# Altium PCB BEE-DAL_EXP.PcbDoc (part 2 of 5)
Units mm, origin at the board's own origin, x right, y up, seen from the top; angles counter-clockwise.
Board outline 93 x 90 mm, 6 copper layers (L1 TOP, L2 GND, L3 SIGNAL, L4 PWR, L5 GND, L6 BOT), stack 1.516 mm thick; 548 components, 447 nets, 1827 pads, 1142 vias.
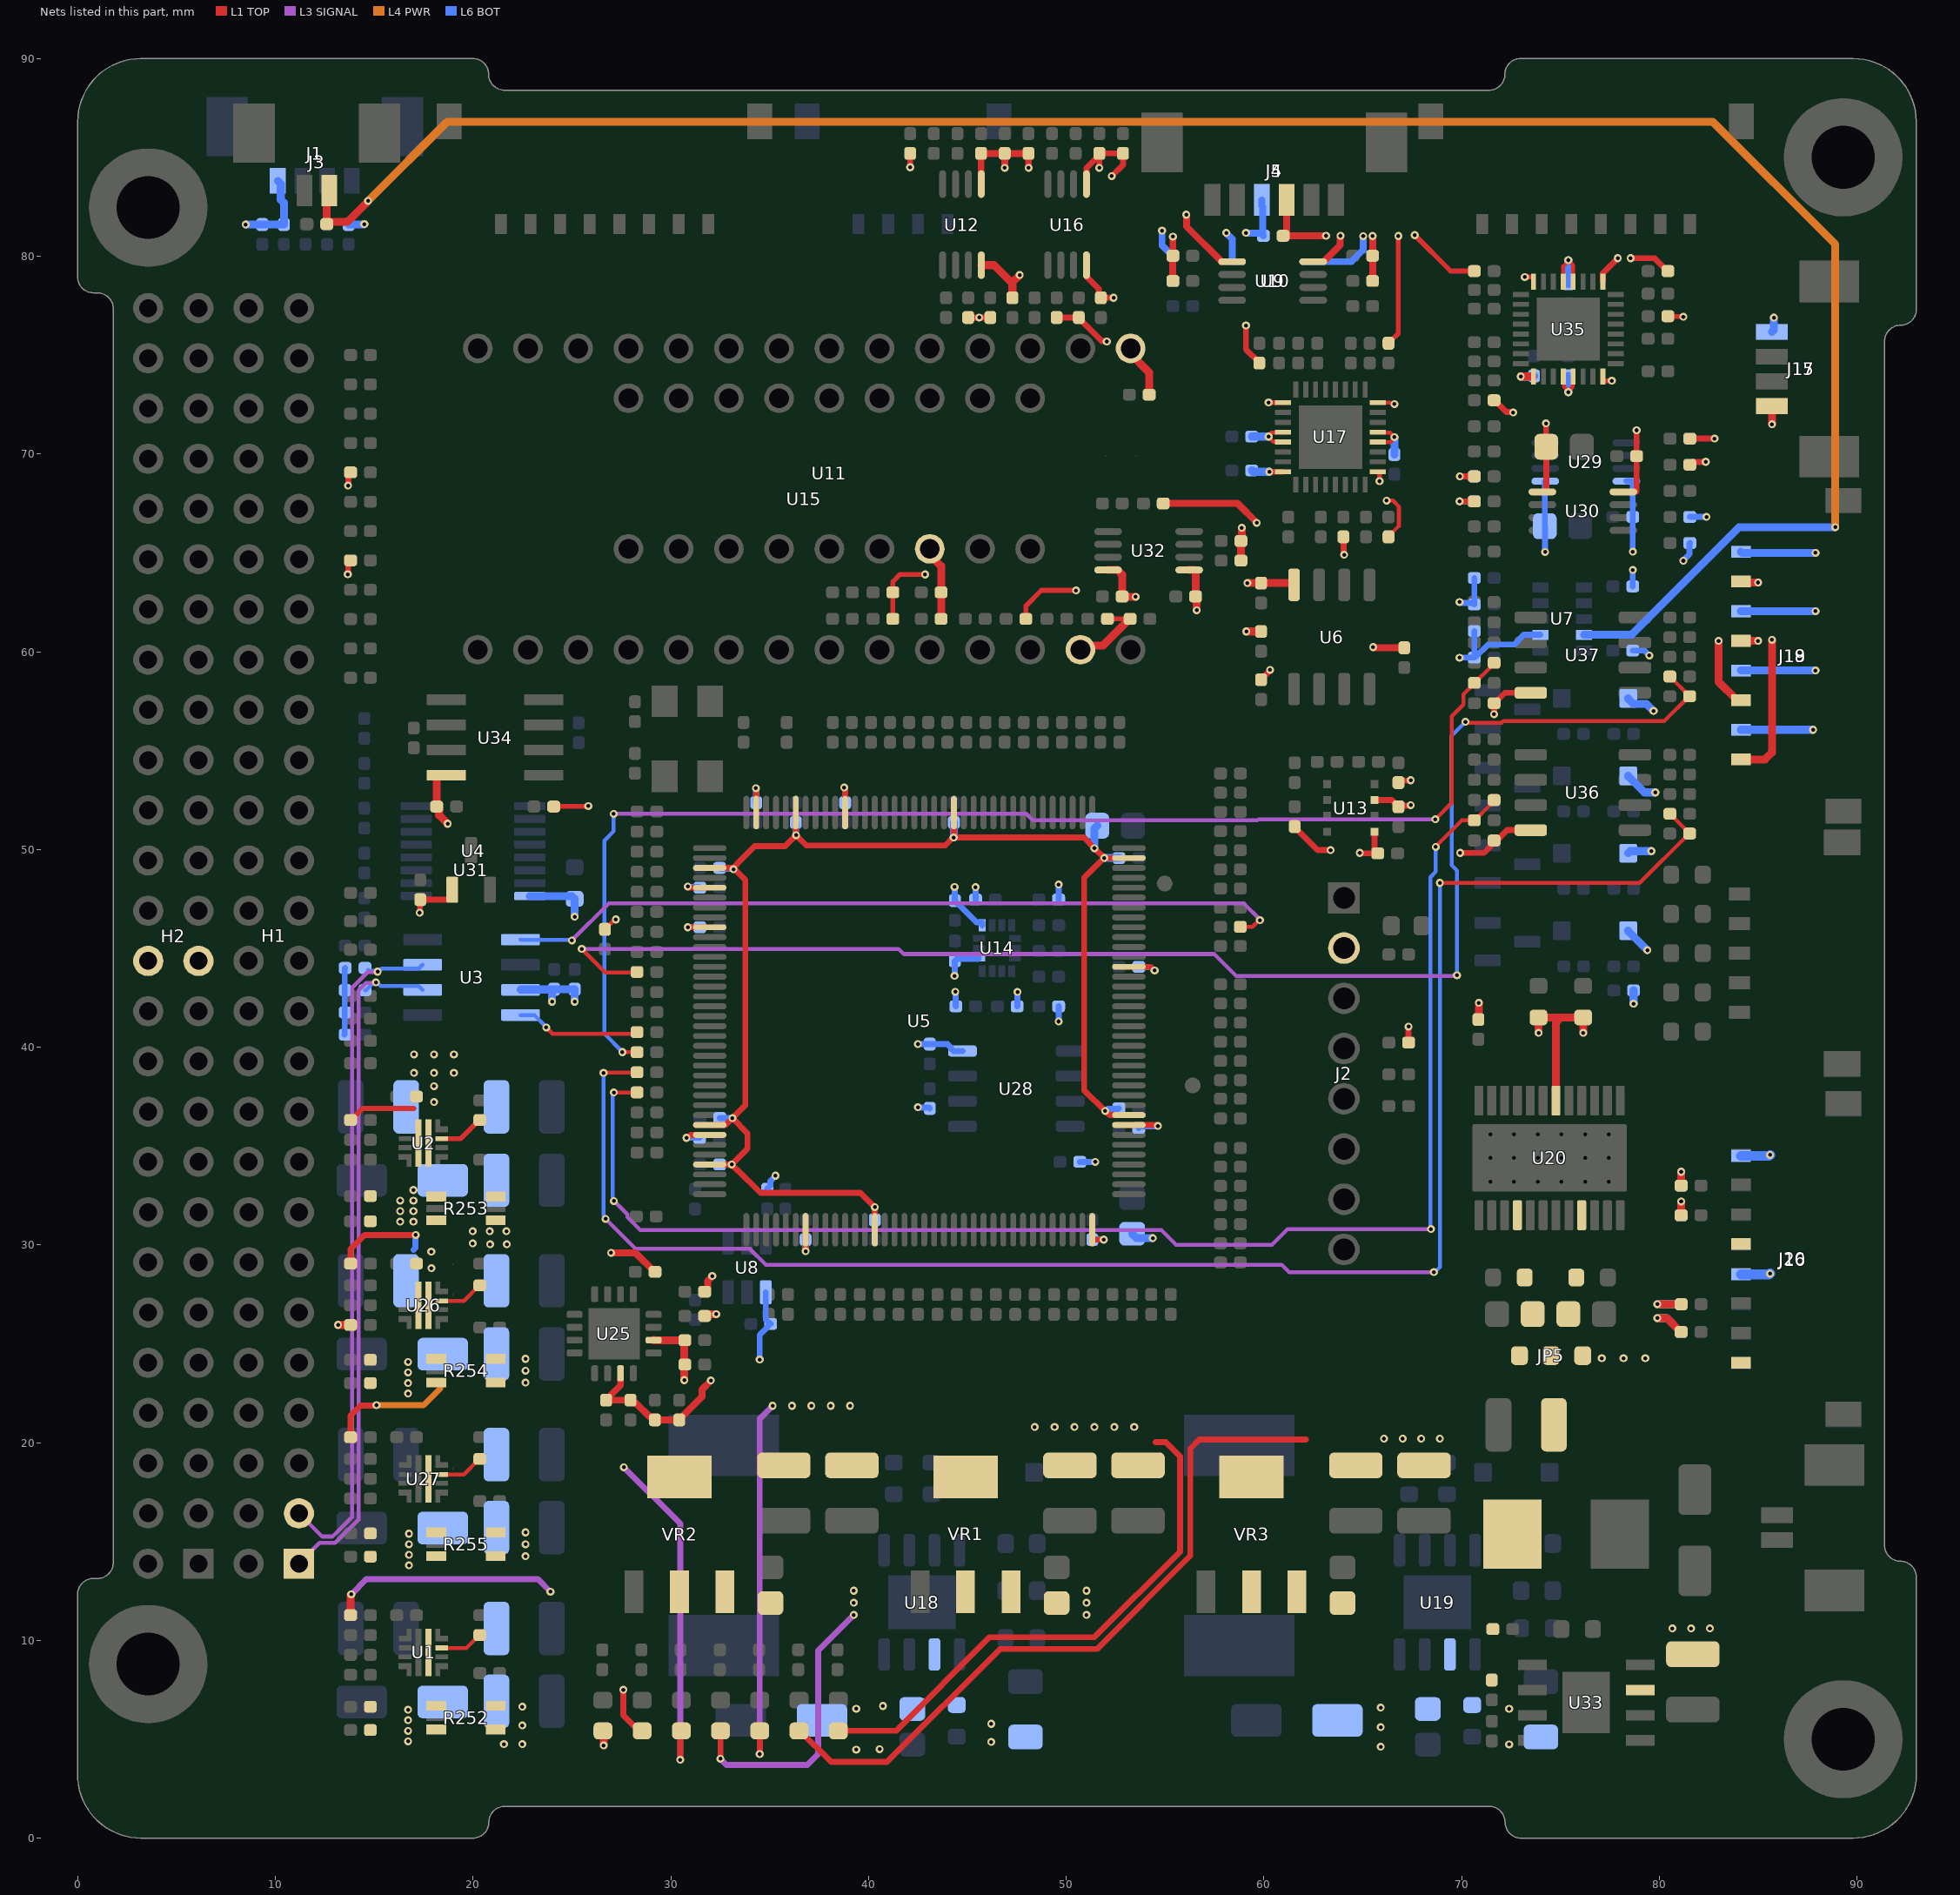
[diagram p6: the nets of this part, all layers, seen from the top]

## Footprints (in the part's own frame and the unit in brackets; to place one, negate y for a bottom-side part, rotate by r counter-clockwise, add the part's x,y. Pads: shape width x height; smd on the part's side, far side on the other; paste and mask are expansions set on the pad) (continued)
Header_254P_8x1 [mm]
  rect 1.6x1.6 hole 1.1: 1(-8.89,0)
  round 1.6 hole 1.1: 2(-6.35,0) 3(-3.81,0) 4(-1.27,0) 5(1.27,0) 6(3.81,0) 7(6.35,0) 8(8.89,0)
  silkscreen extent -10.16,-1.27 10.16,1.27
HEX-M3_NoVia [mm]
  round 6 / inner round 4.4 / far side round 6 hole 3.18: 1(0,0)
IC_BME688 [mm]
  rect 0.4x0.4 smd: 1(1.2,1.2) 2(1.2,0.4) 3(1.2,-0.4) 4(1.2,-1.2) 5(-1.2,-1.2) 6(-1.2,-0.4) 7(-1.2,0.4) 8(-1.2,1.2)
  silkscreen extent -1.5,-1.72 2.14,1.72, body extent -1.5,-1.5 1.5,1.5, height 1
IC_DRV8910QPWPRQ1 [mm]
  rrect25% 1.5x0.45 smd mask+0: 1(-2.9,3.575) 2(-2.9,2.925) 3(-2.9,2.275) 4(-2.9,1.625) 5(-2.9,0.975) 6(-2.9,0.325) 7(-2.9,-0.325) 8(-2.9,-0.975) 9(-2.9,-1.625) 10(-2.9,-2.275) 11(-2.9,-2.925) 12(-2.9,-3.575) 13(2.9,-3.575) 14(2.9,-2.925) 15(2.9,-2.275) 16(2.9,-1.625) 17(2.9,-0.975) 18(2.9,-0.325) 19(2.9,0.325) 20(2.9,0.975) 21(2.9,1.625) 22(2.9,2.275) 23(2.9,2.925) 24(2.9,3.575)
  round 0.3 hole 0.2 mask+0: 25(-1.2,3) 25(-1.2,1.8) 25(-1.2,0.6) 25(-1.2,-0.6) 25(-1.2,-1.8) 25(-1.2,-3) 25(0,3) 25(0,1.8) 25(0,0.6) 25(0,-0.6) 25(0,-1.8) 25(0,-3) 25(1.2,3) 25(1.2,1.8) 25(1.2,0.6) 25(1.2,-0.6) 25(1.2,-1.8) 25(1.2,-3)
  rrect4% 3.4x7.8 smd paste-5 mask+0: 25(0,0)
  L1 TOP region: -1.7,3.9 -1.7,-3.9 1.7,-3.9 1.7,3.9
  silkscreen extent -3.56,-4.06 2.29,4.19, body extent -3.2,-3.9 3.2,3.9, height 1.2
IC_RV-3129-C3_32.768KHZ_OPTION_A_TB_QA [mm]
  rect 0.8x0.5 smd mask+0.05: 1(-1.1,1.6) 2(-1.1,0.8) 3(-1.1,0) 4(-1.1,-0.8) 5(-1.1,-1.6) 6(1.1,-1.6) 7(1.1,-0.8) 8(1.1,0) 9(1.1,0.8) 10(1.1,1.6)
  silkscreen extent -1.85,-1.85 0.38,2.2, body extent -1.25,-1.85 1.25,1.85, height 0.9
IND_MP_1250x1250x850 [mil]
  rect 122x220 smd paste+0 mask+0: 1(-199,0) 2(199,0)
  L1 TOP keep-out region: -136,-244 -136,244 136,244 136,-244
  silkscreen extent -251,-251 251,251, body extent -236,-236 236,236, height 305
JUMPER_1-2_1608X60 [mm] "Chip Resistor, 2-Leads, Body 1.63x0.83mm, IPC High Density"
  rrect50% 0.85x0.95 smd: 1(0,0) 2(-1.6,0) 3(1.6,0)
  silkscreen extent -1.7,-0.7 1.8,0.7, body extent -1.67,-0.48 0.08,0.48, height 0.6
JUMPER_1608 [mil]
  round 1 smd paste-99999: 1(30.51,0) 2(-30,0)
  L1 TOP region: -14.86,-0.09 3.75,-18.7 -38.37,-18.7 -41.57,-18.06 -44.28,-16.25 -46.1,-13.54 -46.73,-10.33 -46.73,-10.33 -46.73,10.33 -46.1,13.54 -44.28,16.25 -41.57,18.06 -38.37,18.7 -38.37,18.7 3.93,18.7
  L1 TOP region: 38.88,-18.7 13.56,-18.7 -5,0 13.56,18.7 38.88,18.7 42.08,18.06 44.79,16.25 46.61,13.54 47.24,10.33 47.24,10.33 47.24,-10.33 46.61,-13.54 44.79,-16.25 42.08,-18.06 38.88,-18.7
  silkscreen extent -40,-27 41,27
LED_0603 [mm]
  rrect50% 0.85x0.95 smd: 1(-0.775,0) 2(0.775,0)
  silkscreen extent -1.4,-0.7 0.9,0.7, body extent -0.8,-0.4 0.8,0.4, height 0.7
molex_0532610271 [mm]
  rect 0.8x1.6 smd mask+0.076: 1(-0.625,2.4) 2(0.625,2.4)
  rect 2.1x3 smd mask+0.076: M1(-3.175,-0.5) M2(3.175,-0.5)
  silkscreen extent -3.83,-2.6 3.83,3.6, body extent -3.83,-2.6 3.83,2.6, height 3.4
MOLEX_0532610271 [mm]
  rect 0.8x1.6 smd mask+0.076: 1(-0.625,2.4) 2(0.625,2.4)
  rect 2.1x3 smd mask+0.076: M1(-3.175,-0.5) M2(3.175,-0.5)
  silkscreen extent -3.83,-2.6 3.83,3.6, body extent -3.83,-2.6 3.83,2.6, height 3.4
MOLEX_0532610471 [mm]
  rect 0.8x1.6 smd mask+0.076: 1(-1.875,2.4) 2(-0.625,2.4) 3(0.625,2.4) 4(1.875,2.4)
  rect 2.1x3 smd mask+0.076: M1(-4.425,-0.5) M2(4.425,-0.5)
  silkscreen extent -5.07,-2.6 5.07,3.4, body extent -5.07,-2.6 5.07,2.6, height 3.4
MOLEX_0532610671 [mm]
  rect 0.8x1.6 smd: 1(-3.125,1.45) 2(-1.875,1.45) 3(-0.625,1.45) 4(0.625,1.45) 5(1.875,1.45) 6(3.125,1.45)
  rect 2.1x3 smd: M1(-5.675,-1.45) M2(5.675,-1.45)
  silkscreen extent -6.12,-3.55 6.12,2, body extent -6.32,-3.43 6.32,1.77, height 3.4
MOLEX_0533980471 [mm]
  rect 0.8x1.3 smd mask+0.076: 1(1.875,-1.75) 2(0.625,-1.75) 3(-0.625,-1.75) 4(-1.875,-1.75)
  rect 2.1x3 smd mask+0.076: M1(4.425,1) M2(-4.425,1)
  silkscreen extent -5.07,-2.6 5.07,2.1, body extent -5.07,-2.15 5.07,2.05, height 4.7
MOLEX_5040500491 [mm]
  rect 0.6x1 smd mask+0.076: 1(2.25,-2.87) 2(0.75,-2.87) 3(-0.75,-2.87) 4(-2.25,-2.87)
  rect 1.25x1.8 smd mask+0.076: M1(4.855,2.32) M2(-4.855,2.32)
  silkscreen extent -5.28,-3.7 5.28,3.22, body extent -5.27,-3.2 5.28,3.24, height 2
MOLEX_5040500591 [mil]
  rect 26x41 smd paste+0 mask+4.02: 1(118.11,-119.76) 2(59.06,-119.76) 3(0,-119.76) 4(-59.06,-119.76) 5(-118.11,-119.76)
  rect 51x73 smd paste+0 mask+4.02: M1(220.67,84.57) M2(-220.67,84.57)
  silkscreen extent -226,-155 226,125, body extent -237,-128 237,126, height 78
MOLEX_5040500891 [mm]
  rect 0.6x1 smd mask+0.076: 1(5.25,-2.87) 2(3.75,-2.87) 3(2.25,-2.87) 4(0.75,-2.87) 5(-0.75,-2.87) 6(-2.25,-2.87) 7(-3.75,-2.87) 8(-5.25,-2.87)
  rect 1.25x1.8 smd mask+0.076: M1(7.855,2.32) M2(-7.855,2.32)
  silkscreen extent -8.27,-3.7 8.27,3.22, body extent -8.27,-3.2 8.27,3.24, height 2
MP_HIGHDRIVER [mm]
  round 1.5 hole 1 paste-2539.97 mask+0: 1(-10.16,-3.81) 2(-7.62,-3.81) 3(-5.08,-3.81) 4(-2.54,-3.81) 5(0,-3.81) 6(2.54,-3.81) 7(5.08,-3.81) 8(7.62,-3.81) 9(10.16,-3.81) 10(10.16,3.81) 11(7.62,3.81) 12(5.08,3.81) 13(2.54,3.81) 14(0,3.81) 15(-2.54,3.81) 16(-5.08,3.81) 17(-7.62,3.81) 18(-10.16,3.81)
  silkscreen extent -12.7,-5.38 12.7,5.08, body extent -12.88,-5.15 12.88,5.2, height 7.25
MP_HIGHDRIVER4 [mm]
  round 1.5 hole 1 paste-2539.97 mask+0: 1(-16.51,-7.62) 2(-13.97,-7.62) 3(-11.43,-7.62) 4(-8.89,-7.62) 5(-6.35,-7.62) 6(-3.81,-7.62) 7(-1.27,-7.62) 8(1.27,-7.62) 9(3.81,-7.62) 10(6.35,-7.62) 11(8.89,-7.62) 12(11.43,-7.62) 13(13.97,-7.62) 14(16.51,-7.62) 15(16.51,7.62) 16(13.97,7.62) 17(11.43,7.62) 18(8.89,7.62) 19(6.35,7.62) 20(3.81,7.62) 21(1.27,7.62) 22(-1.27,7.62) 23(-3.81,7.62) 24(-6.35,7.62) 25(-8.89,7.62) 26(-11.43,7.62) 27(-13.97,7.62) 28(-16.51,7.62)
  silkscreen extent -19.05,-9.19 19.05,8.89, body extent -19.1,-8.93 19.1,8.93, height 6.04
PQFN50P250X300X86-14N [mm]
  rect 0.61x0.35 smd mask+0: 1(-1.16,0.75) 2(-1.16,0.25) 3(-1.16,-0.25) 4(-1.16,-0.75) 8(1.16,-0.75) 9(1.16,-0.25) 10(1.16,0.25) 11(1.16,0.75)
  rect 0.35x0.61 smd mask+0: 5(-0.5,-0.91) 6(0,-0.91) 7(0.5,-0.91) 12(0.5,0.91) 13(0,0.91) 14(-0.5,0.91)
  silkscreen extent -2.19,-1.3 1.55,1.3, body extent -1.5,-1.25 1.5,1.25, height 0.86
PSM6050 [mm]
  rect 3.5x2.95 smd: 1(0,-2.725) 2(0,2.725)
  silkscreen extent -3.58,-3.9 3.6,3.96, body extent -3.3,-3.65 3.3,3.65
RES_C_1005X40 [mm]
  rrect50% 0.65x0.6 smd mask+0.05: 1(-0.5,0) 2(0.5,0)
  silkscreen extent -0.04,-0.3 0.04,0.3, body extent -0.5,-0.3 0.5,0.3, height 0.2
RES_C_1206_SHUNT [mm] "Chip Resistor, 2-Leads, Body 3.2x1.6mm, IPC Medium Density"
  rect 1x0.5 smd mask+0.1: 1(-1.5,-0.6) 1(-1.5,0.6) 2(1.5,-0.6) 2(1.5,0.6)
  rect 1x0.35 smd mask+0.1: 3(-1.5,0) 4(1.5,0)
  silkscreen extent -0.6,-0.77 0.6,0.78, body extent -1.6,-0.8 1.6,0.8, height 1
RES_C_1608X60 [mm] "Chip Resistor, 2-Leads, Body 1.63x0.83mm, IPC High Density"
  rrect50% 0.85x0.95 smd: 1(-0.8,0) 2(0.8,0)
  silkscreen extent -0.9,-0.7 0.9,0.7, body extent -0.87,-0.48 0.87,0.48, height 0.6
RES_C_3216X70 [mm] "Chip Resistor, 2-Leads, Body 3.20x1.60mm, IPC Medium Density"
  rrect39% 1.25x1.75 smd: 1(-1.4,0) 2(1.4,0)
  silkscreen extent -0.6,-0.9 0.6,0.9, body extent -1.68,-0.87 1.68,0.87, height 0.71
SAMTEC_ESQ-126-14-G-D [mm]
  rect 1.53x1.53 hole 0.9: 01(0,0)
  round 1.53 hole 0.9: 02(0,2.54) 03(2.54,0) 04(2.54,2.54) 05(5.08,0) 06(5.08,2.54) 07(7.62,0) 08(7.62,2.54) 09(10.16,0) 10(10.16,2.54) 11(12.7,0) 12(12.7,2.54) 13(15.24,0) 14(15.24,2.54) 15(17.78,0) 16(17.78,2.54) 17(20.32,0) 18(20.32,2.54) 19(22.86,0) 20(22.86,2.54) 21(25.4,0) 22(25.4,2.54) 23(27.94,0) 24(27.94,2.54) 25(30.48,0) 26(30.48,2.54) 27(33.02,0) 28(33.02,2.54) 29(35.56,0) 30(35.56,2.54) 31(38.1,0) 32(38.1,2.54) 33(40.64,0) 34(40.64,2.54) 35(43.18,0) 36(43.18,2.54) 37(45.72,0) 38(45.72,2.54) 39(48.26,0) 40(48.26,2.54) 41(50.8,0) 42(50.8,2.54) 43(53.34,0) 44(53.34,2.54) 45(55.88,0) 46(55.88,2.54) 47(58.42,0) 48(58.42,2.54) 49(60.96,0) 50(60.96,2.54) 51(63.5,0) 52(63.5,2.54)
  silkscreen extent -2.27,-1.2 65.03,3.74, body extent -1.52,-1.27 65.02,3.81, height 11.1
SOD3717X145N [mm]
  rrect22% 0.9x0.95 smd: 1(-1.68,0) 2(1.681,-0.003)
  silkscreen extent -2.4,-1.1 1.5,1.1, body extent -1.83,-0.77 1.83,0.77, height 1.5
SOIC8_150MIL_N_ISI [mil]
  rrect50% 57.5x22 smd paste+0: 1(-107.25,75) 2(-107.25,25) 3(-107.25,-25) 4(-107.25,-75) 5(107.25,-75) 6(107.25,-25) 7(107.25,25) 8(107.25,75)
  silkscreen extent -138,-99 78,98, body extent -122,-99 122,99, height 69
SOIC127P600X175-8N [mm]
  rrect25% 1.97x0.59 smd paste+0 mask+0.102: 1(-2.475,1.905) 2(-2.475,0.635) 3(-2.475,-0.635) 4(-2.475,-1.905) 5(2.475,-1.905) 6(2.475,-0.635) 7(2.475,0.635) 8(2.475,1.905)
  silkscreen extent -4.01,-2.52 1.95,2.52, body extent -3.01,-2.45 3.01,2.45, height 1.63
SOIC127P602X173-8N [mm]
  rrect50% 1.64x0.59 smd: 1(-2.635,1.905) 2(-2.635,0.635) 3(-2.635,-0.635) 4(-2.635,-1.905) 5(2.635,-1.905) 6(2.635,-0.635) 7(2.635,0.635) 8(2.635,1.905)
  silkscreen extent -4.1,-2.5 2,2.8, body extent -3.01,-2.57 3.01,2.57, height 1.73
SOIC127P602X173-8N_EPAD [mm]
  rrect50% 1.64x0.59 smd: 1(-2.635,1.905) 2(-2.635,0.635) 3(-2.635,-0.635) 4(-2.635,-1.905) 5(2.635,-1.905) 6(2.635,-0.635) 7(2.635,0.635) 8(2.635,1.905)
  rect 2.718x3.404 smd paste-0.159: 9(0,0)
  silkscreen extent -3.5,-2.5 2,2.5, body extent -3.01,-2.57 3.01,2.57, height 1.73
SOP65P640X120-16N [mm]
  rrect25% 1.57x0.41 smd mask+0.05: 1(-2.87,2.275) 2(-2.87,1.625) 3(-2.87,0.975) 4(-2.87,0.325) 5(-2.87,-0.325) 6(-2.87,-0.975) 7(-2.87,-1.625) 8(-2.87,-2.275) 9(2.87,-2.275) 10(2.87,-1.625) 11(2.87,-0.975) 12(2.87,-0.325) 13(2.87,0.325) 14(2.87,0.975) 15(2.87,1.625) 16(2.87,2.275)
  silkscreen extent -3.6,-2.5 1.8,2.7, body extent -3.2,-2.5 3.2,2.5, height 1.2
SOT95P240X120-3N [mm]
  rrect25% 1.32x0.6 smd: 1(-1,0.95) 2(-1,-0.95) 3(1,0)
  silkscreen extent -1.6,-1.5 0.7,1.5, body extent -1.3,-1.52 1.3,1.52, height 1.2
SOT95P280X145-6N [mm]
  rrect25% 1.21x0.59 smd: 1(-1.255,0.95) 2(-1.255,0) 3(-1.255,-0.95) 4(1.255,-0.95) 5(1.255,0) 6(1.255,0.95)
  silkscreen extent -1.9,-1.5 0.82,1.5, body extent -1.4,-1.46 1.4,1.46, height 1.4
Testpoint_80 [mm]
  round 0.8 smd paste-2539.97 mask+0: 1(0,0)
TPS54531DDAR [mil] "IC REG BUCK ADJ 5A 8SOPWR"
  rect 57.5x21 smd paste+0 mask+0: 1(-107.25,75) 2(-107.25,25) 3(-107.25,-25) 4(-107.25,-75) 5(107.25,-75) 6(107.25,-25) 7(107.25,25) 8(107.25,75)
  rect 94.49x122.05 smd paste-3.94 mask+0: 9(0,0)
  silkscreen extent -134,-102 75,98, body extent -122,-98 122,98, height 66
TSOP8 [mm] "TSOP, 8-Leads, Body 3x3mm, Pitch 0.65mm, IPC High Density"
  oval 1.4x0.35 smd mask+0.051: 1(-2.05,0.975) 2(-2.05,0.325) 3(-2.05,-0.325) 4(-2.05,-0.975) 5(2.05,-0.975) 6(2.05,-0.325) 7(2.05,0.325) 8(2.05,0.975)
  silkscreen extent -2.7,-1.6 1.6,1.6, body extent -2.35,-1.5 2.35,1.5, height 1.5
UQFN-16_4X4_EP2.6X2.6 [mm]
  rrect50% 0.8x0.35 smd paste+0 mask+0.075: 1(-2,0.975) 2(-2,0.325) 3(-2,-0.325) 4(-2,-0.975) 9(2,-0.975) 10(2,-0.325) 11(2,0.325) 12(2,0.975)
  rrect50% 0.35x0.8 smd paste+0 mask+0.057: 5(-0.975,-2) 6(-0.325,-2) 7(0.325,-2) 8(0.975,-2) 13(0.975,2) 14(0.325,2) 15(-0.325,2) 16(-0.975,2)
  rect 2.6x2.6 smd paste-0.25 mask+0.075: 17(0,0)
  silkscreen extent -2.15,-2.15 2.15,2.15, body extent -2,-2 2,2, height 0.5
VQFN-HR-10 [mm]
  rect 0.65x0.3 smd: 1(-0.938,0.692) 4(-0.941,-0.708) 7(0.909,-0.708) 10(0.909,0.692)
  rect 0.25x0.65 smd: 1(-0.738,0.867) 4(-0.741,-0.883) 7(0.709,-0.883) 10(0.709,0.867)
  rect 0.65x0.25 smd: 2(-0.938,0.216) 3(-0.941,-0.233) 8(0.909,-0.233) 9(0.909,0.216)
  rect 0.3x2.4 smd: 5(-0.265,-0.008) 6(0.235,-0.007)
  silkscreen extent -1.3,-1.25 1.28,1.23, body extent -1.03,-1.01 0.97,0.99, height 1
VREG_LM1117MP-3.3/NOPB [mm]
  rect 2.15x0.95 smd: 1(-2.9,2.3) 2(-2.9,0) 3(-2.9,-2.3)
  rect 2.15x3.25 smd: 4(2.9,0)
  silkscreen extent -4,-3.3 1.8,3.3, body extent -3.5,-3.25 3.5,3.25, height 1.8

## Part data
C1 C2 C3 C7 C8 C9 C20 C22 C27 C28 C68 C73 C78 C79 C113 C114 C115 C116 C117 C118 C119 C120 C121 C122 C123 C124 C128 C129 C130 C136 C138: library part _CAP_C_High_2, "CAP High Value"
C4 C5 C6 C10 C11 C12 C13 C14 C15 C16 C17 C18 C19 C21 C23 C24 C25 C26 C29 C30 C31 C32 C33 C34 C35 C36 C37 C38 C39 C40 C41 C42 C43 C44 C45 C46 C47 C48 C49 C50 C51 C52 C53 C54 C55 C56 C57 C58 C59 C60 C61 C62 C63 C64 C65 C67 C69 C70 C71 C72 C74 C75 C76 C77 C80 C81 C82 C83 C84 C85 C86 C87 C88 C89 C90 C91 C92 C93 C109 C110 C111 C112 C125 C126 C127 C131 C132 C133 C134 C137 C139 C141 C142 C143 C144 C164 C165 C166 C167 C168 C169 C170 C171 C172 C173 C174 C175 C176 C177 C178 C179 C406 C407 C408 C409 C411: library part _CAP_C_2, "CAP"
C66 C410: library part _CAP_C_2, "CAP CHIP"
D1 D2 D4 D6 D8 D9 D17: library part "DIODE SCHOTTKY", "DIODE SCHOTTKY"
D5 D7: library part "DIODE Zener", "Zenner"
D18 D19 D20 D21: library part "Diode SMD", "Default Diode", Code - JEDEC=DO-214-AB, Published=8-Jun-2000, Publisher="Altium Limited", Revision="July-2002: Re-released for DXP Platform."
H1 H2: "CONN SOCKET 52POS 0.1 GOLD PCB", Package=None, Availability=Unavailable, MF=Samtec, MP=ESQ-126-14-G-D, Price=None
J1 J6: library part "Header 4x1_2M"
J3 J11 J12: library part "Header 2x1_2M"
J4 J5: library part FLOW_SENSOR
J7 J8 J9 J10 J16 J18 J19 J20: library part "Header 8x1_2M"
J13 J14: library part "Header 5x1_2M"
J15 J17: library part "Header 4x1_2M_1"
JP1 JP2 JP3 JP4 JP10 JP11: library part JUMPER_1_1
JP5: library part JUMPER_1_2
L1 L2: library part L-SMD-1, "B82477P4473M000", Inductance="1.0 μH", Manufacturer="Wurth Elektronik", partNo=78477010, ComponentLink1Description=Manufacturer, ComponentLink1URL=http://www.we-online.de, ComponentLink2Description=Datasheet, ComponentLink2URL=http://katalog.we-online.de/pbs/datasheet/78477010.pdf, Created by="Baojun Chen", Created Date=Nov.2015
L3: "FIXED IND 22UH 2.5A 170 MOHM SMD"
Q1 Q2 Q3 Q4: library part MOSFET_N, "N-Channel 30 V 5.7A (Ta) 1.4W (Ta) Surface Mount SOT-23-3", Package="SOT-23 Alpha &amp; Omega Semiconductor Inc.", Check_prices=https://www.snapeda.com/parts/AO3400A/Alpha/view-part/?ref=eda, MF="Alpha & Omega Semiconductor", MP=AO3400A, SnapEDA_Link=https://www.snapeda.com/parts/AO3400A/Alpha/view-part/?ref=snap
R1 R2 R3 R4 R5 R6 R7 R8 R9 R10 R11 R12 R13 R14 R15 R16 R17 R18 R19 R20 R22 R23 R24 R25 R26 R27 R28 R29 R30 R31 R32 R33 R34 R35 R36 R37 R38 R39 R40 R42 R44 R46 R47 R48 R49 R50 R51 R52 R53 R54 R55 R56 R57 R58 R59 R60 R61 R62 R63 R64 R65 R66 R67 R68 R69 R70 R71 R72 R73 R74 R75 R76 R77 R78 R79 R80 R81 R82 R83 R84 R85 R86 R87 R88 R89 R90 R91 R92 R93 R94 R96 R97 R98 R99 R101 R102 R103 R104 R105 R106 R107 R108 R109 R110 R111 R112 R113 R114 R115 R116 R117 R118 R119 R120 R121 R122 R123 R124 R125 R126 R127 R128 R129 R130 R131 R132 R133 R134 R135 R136 R137 R138 R139 R140 R141 R142 R143 R144 R145 R146 R147 R148 R149 R150 R151 R152 R153 R154 R155 R156 R157 R158 R159 R160 R161 R162 R163 R164 R165 R166 R167 R168 R169 R170 R171 R172 R174 R175 R177 R178 R179 R180 R233 R234 R235 R236 R237 R238 R239 R240 R241 R242 R243 R244 R245 R246 R247 R248 R249 R250 R251 R256 R257 R258 R259 R260 R261 R262 R263 R264 R265 R266 R267 R268 R269 R270 R271 R272 R273 R274 R275 R276 R277 R278 R279 R281 R282 R283 R284 R285 R286 R287 R288 R289 R292 R293 R294 R295 R296 R297 R298 R299 R302 R303 R304 R305 R306 R307 R308 R309 R310 R311 R312 R313 R315 R316 R317 R318 R319 R320 R321 R322 R323 R324 R325 R326 R327 R328 R329 R330 R331 R332 R334 R335 R336 R337 R338 R339 R340 R341 R342 R343 R344 R345 R346 R347 R348 R349 R350 R351 R352 R353 R354 R355 R409 R410 R411 R412 R413 R414 R415 R416 R417: library part _RES_B_2, "RES"
R173 R176: library part _RES, "RES", Chung_Loai=Dán, Don_Vi=Con, Ma_Hang=MH006333, So_Chan=2, Ten_Linh_Kien="Trở 0603 1% 10k"
R252 R253 R254 R255: library part RSMT1316, "Shunt", Current=8A, Manufacturer 1=SUSUMU, Operating Temperature="-55C to +155C", Package=1206, Power=0.75W, Supplier Part Number 1=408-1570-1-ND, Temperature Coeffcient=50ppm/C, Tolerance=1%, Category=Resistor, ComponentLink1Description="SVN Datasheet", ComponentLink1URL=https://chn-vm-apps.microchip.com/mchprepo/parts/Datasheets/n_catalog_partition09_en.pdf, ComponentLink2Description="Local Datasheet", ComponentLink2URL=C:\ALTIUM_WORK\00001_MCHP-CDB\Datasheets\n_catalog_partition09_en.pdf, ComponentLink3Description="Open Symbol", ComponentLink3URL="C:\ALTIUM_WORK\00001_MCHP-CDB\Library\LibraryRefs\Shunt 4 Pin.SchLib", ComponentLink4Description="Open Footprint", ComponentLink4URL=C:\ALTIUM_WORK\00001_MCHP-CDB\Library\Footprints\RES_C_1206_SHUNT.PcbLib, ComponentLink5Description="Open Footprint 2", ComponentLink6Description="Open Footprint 3", ComponentLink7Description="Open Footprint 4", Composition=MF, Description_="RES SHUNT MF 0.01R 1% 0.75W SMD 1206", Dev Tools Status=Design, Manufacturer Part Number 1=KRL1632E-M-R010-F-T5, MCHP-ID=RSMT1316, Owner="Ciprian Abramov", Populated=YES, Quantity Override=1, Revision=1, Status="MCL Design", Supplier 1=Digi-Key, Symbol="Shunt 4 Pin", TYPE="RES SMD"
TP1 TP2: library part "Test Point", "Test Point", Solder=NF
U3: "3.3 V CAN Transceiver with Standby Mode", Package="SOIC-8 Texas Instruments", Check_prices=https://www.snapeda.com/parts/SN65HVD230DR/Texas+Instruments/view-part/?ref=eda, MF="Texas Instruments", MP=SN65HVD230DR, SnapEDA_Link=https://www.snapeda.com/parts/SN65HVD230DR/Texas+Instruments/view-part/?ref=snap
U4: library part IC_RS232_SN65C3232PWR, "2/2 Transceiver Full RS232 16-TSSOP 1GHz", Package="SOIC-16 Maxim Integrated", Check_prices=https://www.snapeda.com/parts/MAX3232CSE+T/Analog+Devices/view-part/?ref=eda, MF="Analog Devices", MP=MAX3232CSE+T, SnapEDA_Link=https://www.snapeda.com/parts/MAX3232CSE+T/Analog+Devices/view-part/?ref=snap
U5: "SAM 32-bit ARM Cortex-M* RISC MCU, SAMV71B Series, QFP144", Manufacturer=MICROCHIP, MPN=ATSAMV71Q21B-AAB, TemperatureRange="-40Â°C to +105Â°C", AN=A06-1541, Height=1,60000002384186, PartGroup="Integrated Circuits,MCU, MPU, DSP,ARM MCU"
U6: "FRAM _Ferroelectric RAM_ Memory IC 2Mb _256K x 8_ SPI 40MHz 8-SOP", Package="SO-8 Fujitsu", Digi-Key_Part_Number=865-1286-1-ND, Digi-Key_Purchase_URL=https://www.digikey.com/product-detail/en/fujitsu-electronics-america-inc/MB85RS2MTAPNF-G-BDERE1/865-1286-1-ND/7916252?utm_source=snapeda&utm_medium=aggregator&utm_campaign=symbol, MF="Fujitsu Electronics", MP=MB85RS2MTAPNF-G-BDERE1, SnapEDA_Link=https://www.snapeda.com/parts/MB85RS2MTAPNF-G-BDERE1/Fujitsu%20Electronics%20America%2C%20Inc./view-part/2344795/?ref=snap
U7: library part RV-3129-C3_32.768KHZ_OPTION_A_TB_QA, "Real-Time Clock Module, Temperature compensated, in 2.5 x 3.7 mm package", Package="QFN-10 Micro Crystal", Check_prices=https://www.snapeda.com/parts/RV-3129-C3%2032.768KHZ%20OPTION%20A%20TB%20QA/Micro+Crystal/view-part/?ref=eda, MF="Micro Crystal", MP="RV-3129-C3 32.768KHZ OPTION A TB QA", SnapEDA_Link=https://www.snapeda.com/parts/RV-3129-C3%2032.768KHZ%20OPTION%20A%20TB%20QA/Micro+Crystal/view-part/?ref=snap
U8: Package=None, Availability=Unavailable, MP=TPL5010QDDCTQ1, Price=None
U13: "Gas sensor measuring relative humidity, barometric pressure, ambient temperature and gas (VOC)", Package=None, Availability=Unavailable, MP=BME688, Price=None
U14: "Accelerometer, Gyroscope, 6 Axis Sensor I2C, SPI Output", Package="VFLGA-14 STMicroelectronics", Check_prices=https://www.snapeda.com/parts/LSM6DSOXTR/STMicroelectronics/view-part/?ref=eda, MF=STMicroelectronics, MP=LSM6DSOXTR, SnapEDA_Link=https://www.snapeda.com/parts/LSM6DSOXTR/STMicroelectronics/view-part/?ref=snap
U15: library part mp_HighDriver4
U17 U35: "36V, 1A Octal Integrated Serial-Controlled Solenoid and Motor Driver", Manufacturer_Name="Analog Devices Inc", Copyright="Copyright (C) 2026 Ultra Librarian. All rights reserved.", Manufacturer_Part_Number=MAX22200ETJ+T, RefDes=RefDes, TYPE=Type
U18 U19: "IC LED DRIVER RGLTR PWM 3A 8SO"
U20: "Automotive, 40-V, 6-A, 10-channel half-bridge motor driver with advanced diagnostics", Package="HTSSOP-24 Texas Instruments", Availability="In Stock", Check_prices=https://www.snapeda.com/parts/DRV8910QPWPRQ1/Texas+Instruments/view-part/?ref=eda, MF="Texas Instruments", MP=DRV8910QPWPRQ1, Price=None, Purchase-URL=https://pricing.snapeda.com/search?q=DRV8910QPWPRQ1&ref=eda, SnapEDA_Link=https://www.snapeda.com/parts/DRV8910QPWPRQ1/Texas+Instruments/view-part/?ref=snap
U25: library part MIC8883, Manufacturer 1="Microchip Technology", Manufacturer Part Number 1=PAC1934T-I/JQ, Supplier Part Number 1=PAC1934T-I/JQCT-ND, Category=MCHP-Analog, ComponentLink1Description="SVN Datasheet", ComponentLink2Description="Local Datasheet", ComponentLink3Description="Open Symbol", ComponentLink3URL="C:\ALTIUM_WORK\00001_MCHP-CDB\Library\LibraryRefs\PAC1934 UQFN-16.SchLib", ComponentLink4Description="Open Footprint", ComponentLink4URL=C:\ALTIUM_WORK\00001_MCHP-CDB\Library\Footprints\UQFN-16_4X4_EP2.6X2.6.PcbLib, ComponentLink5Description="Open Footprint 2", ComponentLink6Description="Open Footprint 3", ComponentLink7Description="Open Footprint 4", Description_="MCHP ANALOG POWER CURRENT SENSE MONITOR PAC1934T-I/JQ UQFN-16", Dev Tools Status=Design, MCHP-ID=MIC8883, Owner="Ciprian Abramov", Populated=YES, Quantity Override=1, Revision=1, Status="MCL Design", Supplier 1=Digi-Key, Symbol="PAC1934 UQFN-16", TYPE="Power/Current Sensor"
U28: library part IS66WVS4M8BLL-104NLI, "No Description Available", Manufacturer_Name=ISSI, Copyright="Copyright (C) 2025 Ultra Librarian. All rights reserved.", Manufacturer_Part_Number=IS66WVS4M8BLL-104NLI, RefDes=RefDes, TYPE=Memory
U31: library part IC_SENSOR_TC1047AVNBTR, "Temperature Sensor Analog, Local -40°C ~ 125°C 10mV/°C SOT-23-3"
U33: "IC REG BUCK ADJ 3A 8SOPWR"
U34: "Low-Power, Slew-Rate-Limited RS-485/RS-422 Transceivers, IC TRANSCEIVER HALF 1/1 8SOIC", Manufacturer_Name="Analog Devices Inc", Manufacturer_Part_Number=MAX485CSA+T, Copyright="Copyright (C) 2025 Ultra Librarian. All rights reserved.", RefDes=RefDes, TYPE=Type
VR1 VR2 VR3: "800-mA 15-V linear voltage regulator", Package="SOT-223-4 Texas Instruments", Check_prices=https://www.snapeda.com/parts/LM1117MP-3.3/NOPB/Texas+Instruments/view-part/?ref=eda, MF="Texas Instruments", MP=LM1117MP-3.3/NOPB, SnapEDA_Link=https://www.snapeda.com/parts/LM1117MP-3.3/NOPB/Texas+Instruments/view-part/?ref=snap
XC1: library part A07-0042, "Fox FQ5032B 12.0MHz SMD crystal 738B-12", Manufacturer="Fox  Electronics", MPN=FQ5032B-12.000, TemperatureRange="0Â°C ~ 70Â°C", Tolerance=Â±30ppm, AN=A07-0042, Height=1,20000004768372, PartGroup="Frequency devices,Crystals,SMD"

## Via types
v1: diameter 0.4, hole 0.2, L1 TOP to L6 BOT, tented both sides, 1132 vias
v2: diameter 0.6, hole 0.3, L1 TOP to L6 BOT, tented both sides, 10 vias

## Nets (pads, with @x,y where several pads share a name; then routed paths per layer and width w, separated by ;. In a path a pad name is that pad's centre, name@x,y a point inside that pad or via, vN(x,y) a via of type N, cw(c..) or ccw(c..) an arc to the next point about the centre after c; other vN are vias at no path point)
3.3_VBAT: C47.2 J3.1 U7.9 | length 112
  L1 TOP w0.4: J3.1@12.725,83.321 12.6,83.196 C47.2@12.6,81.63 12.7,81.73 13.644,81.73 14.69,82.776 v1(14.69,82.8)
  L4 PWR w0.4: v1(14.69,82.8) 18.69,86.8 82.698,86.8 88.9,80.598 v1(88.9,66.3)
  L6 BOT w0.4: U7.9@76.194,60.853 78.593,60.853 84.04,66.3 v1(88.9,66.3)
3.3V_COM: C13.1 C14.1 C16.2 C117.2 C118.2 C134.2 D13.2 R275.1 U3.3 U4.16 U34.8 VR2.2 VR2.4 | length 31.3
  L1 TOP w0.25: R275.1@24.081,52.17 24.093,52.182 25.818,52.182 v1(25.831,52.194)
  L1 TOP w0.3: v1(34.5,4.25) 34.502,4.252 34.502,5.423 D13.2@34.505,5.425
  L1 TOP w0.4: C134.2@18.16,52.17 18.185,52.17 18.285,52.07 18.285,51.735 v1(18.72,51.3) ; C134.2@18.179,52.17 18.16,52.189 18.16,53.685 18.23,53.755 U34.8@18.685,53.755
  L3 SIGNAL w0.3: v1(34.5,4.25) 34.5,21.21 v1(35.15,21.86)
  L6 BOT w0.4: U3.3@22.402,42.898 22.419,42.915 24.082,42.915 C14.1@24.1,42.933 ; U4.16@22.871,47.644 22.876,47.639 24.999,47.639 C16.2@25.14,47.498 v1(25.14,46.6) ; v1(24,42.3) 24,42.833 C14.1@24.1,42.933 ; v1(25.14,42.3) C13.1@25.14,42.933 C14.1@24.1,42.933
  other v1: 36.13,21.86 37.11,21.86 38.09,21.86 39.07,21.86
3.3V_MCU: C18.2 C27.1 C29.2 C30.2 C31.2 C32.2 C33.2 C34.2 C35.2 C36.2 C37.2 C46.2 C48.2 C49.2 C50.2 C51.2 C54.2 C55.2 C56.2 C57.2 C60.2 C109.1 C110.1 C111.1 C112.1 C114.2 C115.2 C136.1 C137.2 C138.1 C139.2 C141.2 C165.2 C166.1 C167.2 C170.2 C175.2 D12.2 J1.1 J2.2 J4.3 J5.3 J15.1 J17.1 J19.1 J19.3 J19.5 J19.7 R23.2 R24.2 R78.2 R108.1 R114.2 R115.2 R116.2 R117.2 R118.2 R119.2 R120.2 R121.1 R122.2 R126.1 R127.1 R128.1 R129.1 R131.1 R132.1 R136.1 R137.1 R140.1 R141.1 R145.1 R146.1 R147.1 R148.1 R149.1 R157.1 R158.1 R164.1 R165.1 R170.1 R247.1 R248.1 R249.1 R250.1 R251.2 R277.1 R281.1 R282.1 R283.1 R284.1 R292.1 R293.1 R294.1 R295.1 R327.2 R328.2 R329.2 R330.2 R409.1 R410.1 R415.1 U5.5 U5.9 U5.30 U5.43 U5.72 U5.80 U5.96 U5.134 U5.143 U6.8 U7.2 U8.1 U9.1 U9.8 U10.1 U10.8 U12.1 U13.6 U13.8 U14.5 U14.8 U16.1 U25.2 U25.15 U28.8 U29.1 U29.8 U30.1 U30.8 U31.1 U32.1 U36.8 U37.8 VR1.2 VR1.4 | length 213.2
  L1 TOP w0.2: R108.1@26.671,45.958 26.673,45.958 27.173,46.458 v1(27.225,46.458)
  L1 TOP w0.25: R164.1@66.304,75.6 66.304,75.611 66.492,75.8 66.504,75.8 66.8,76.096 v1(66.8,81.024) ; v1(67.633,81.066) 69.449,79.25 R409.1@70.643,79.25 ; R415.1@80.435,76.966 80.448,76.953 81.205,76.953 v1(81.218,76.939)
  L1 TOP w0.3: v1(17.3,46.8) 17.315,46.815 17.315,47.447 C141.2@17.33,47.462 18.8,47.462 18.95,47.612 U31.1@18.95,47.962 ; v1(30.797,35.414) 30.816,35.434 30.886,35.434 31.017,35.564 U5.30@31.972,35.564 ; v1(30.86,46.064) U5.9@31.972,46.064 ; v1(30.86,48.122) 30.887,48.122 30.945,48.064 U5.5@31.972,48.064 ; v1(34.31,53.095) 34.322,53.084 U5.143@34.322,51.864 ; v1(36.822,29.68) U5.43@36.822,30.764 ; D12.2@38.473,5.425 41.395,5.425 46.13,10.16 51.438,10.16 55.758,14.48 55.758,19.306 55.044,20.02 54.518,20.02 ; v1(38.775,53.128) 38.775,53.101 38.822,53.054 U5.134@38.822,51.864 ; v1(42.109,84.5) R137.1@42.109,85.2 ; U12.1@45.705,83.981 45.705,84.175 45.705,84.741 ; U16.1@51.026,83.65 51.026,84.47 51.582,85.025 51.607,85.025 R157.1@51.679,85.097 ; U5.72@51.322,30.764 51.322,30.264 v1(51.9,30.264) ; v1(51.679,84.47) R157.1@51.679,85.097 ; R157.1@51.679,85.2 R157.1@51.679,85.097 ; v1@52.319,84.069 52.875,84.625 C60.2@52.875,85.175 ; C60.2@52.766,85.158 52.725,85.2 51.757,85.2 51.757,85.175 R157.1@51.679,85.097 ; C60.2@52.812,85.113 C60.2@52.875,85.175 ; C60.2@52.875,85.2 C60.2@52.875,85.175 ; U5.80@53.172,36.064 54.562,36.064 54.614,36.013 v1(54.641,36.013) ; U5.96@53.172,44.064 54.259,44.064 54.448,43.875 v1(54.475,43.875) ; v1(59.095,76.5) 59.095,75.3 59.77,74.625 R165.1@59.77,74.6 ; R114.2@59.86,58.58 59.86,58.605 60.31,59.055 v1(60.31,59.08) ; R140.1@61.555,51.16 61.555,51.135 62.725,49.966 63.372,49.966 v1(63.375,49.962) ; R170.1@64.02,65.809 64.041,65.789 64.041,64.923 v1(64.06,64.904) ; v1(64.85,49.825) 64.877,49.825 64.902,49.8 C55.2@65.75,49.8 ; U13.8@65.6,50.9 65.6,49.95 C55.2@65.75,49.8 ; U13.6@65.6,52.5 66.469,52.5 66.634,52.335 66.659,52.335 66.809,52.185 C54.2@66.809,52.16 66.867,52.218 67.406,52.218 v1(67.425,52.238) ; C55.2@65.759,49.8 C55.2@65.75,49.8 ; R141.1@66.809,53.38 66.91,53.481 67.406,53.481 v1(67.425,53.5) ; R78.2@67.32,40.23 v1(67.32,41.044) ; v1(69.9,67.601) R293.1@70.643,67.601 ; v1(69.912,68.868) R292.1@70.643,68.867 ; v1(69.927,49.825) 71.132,49.825 71.468,50.161 71.468,50.303 71.618,50.453 C170.2@71.785,50.453 ; R410.1@71.643,72.716 71.668,72.716 72.265,72.119 72.595,72.119 v1(72.615,72.1) ; v1(71.644,56.837) 71.644,57.373 72.192,57.921 U37.8@73.5,57.921 ; C170.2@71.81,50.453 71.96,50.603 71.96,50.628 72.309,50.977 U36.8@73.5,50.977 ; v1(74.27,71.55) 74.278,71.542 74.278,70.372 C138.1@74.286,70.365 74.286,68.108 74.309,68.084 U30.1@74.429,68.084 ; U30.8@78.529,68.084 78.831,68.084 78.854,68.108 C139.2@78.854,69.889 v1(78.854,71.2) ; R294.1@81.543,69.457 81.674,69.587 82.331,69.587 v1(82.35,69.607) ; R295.1@81.543,70.777 v1(82.8,70.777)
  L1 TOP w0.35: C109.1@26.733,22.148 C111.1@27.966,22.148 27.966,22.123 28.091,21.998 28.242,21.998 28.942,21.298 29.074,21.298 29.199,21.173 R249.1@29.199,21.148 R250.1@30.433,21.148 30.433,21.173 31.582,22.322 31.582,22.685 32.03,23.133 v1(32.03,23.147) ; C109.1@26.733,22.173 27.458,22.898 U25.15@27.458,23.277 ; v1(26.978,29.6) 28.221,29.6 29.183,28.638 R251.2@29.208,28.638 ; R248.1@31.715,27.633 31.74,27.633 31.865,27.758 31.865,28.176 32.1,28.411 v1(32.1,28.425) ; U12.1@45.705,84.175 45.698,84.183 45.698,84.741 R136.1@45.698,85.2 C167.2@46.894,85.2 v1(46.894,84.47) ; C167.2@46.894,85.2 47.615,85.2 ; 47.615,85.2 R158.1@48.09,85.2 48.095,85.195 48.095,84.475 v1(48.1,84.47) ; R277.1@54.909,67.5 58.662,67.5 v1(59.641,66.521) ; R126.1@55.398,78.75 R127.1@55.398,80.025 v1(55.4,80.995) ; v1(56.073,82.1) 56.083,82.09 56.083,81.512 57.87,79.725 U9.1@58.395,79.725 ; C50.2@60.975,81.034 C50.2@61,81.034 ; J4.3@61.15,82.85 61.15,81.184 C50.2@61,81.034 ; U9.8@62.495,79.725 63.02,79.725 63.865,80.57 63.865,81.024 v1(63.875,81.034) ; v1(63.144,81.034) 61.15,81.034 C50.2@61,81.034 ; R128.1@65.5,78.75 R129.1@65.5,80.025 v1(65.5,81.024) ; v1(65.525,60.231) 65.539,60.231 65.569,60.2 R116.2@67.1,60.2
  L1 TOP w0.4: U25.2@29.133,25.183 29.135,25.181 29.895,25.181 29.898,25.178 C112.1@30.715,25.178 30.689,25.151 v1(30.689,23.16) ; R247.1@31.715,26.406 31.809,26.5 v1(32.3,26.5) ; U32.1@56.223,64.132 56.523,64.132 56.548,64.107 C165.2@56.548,62.793 56.6,62.741 v1(56.6,62.1) ; R329.2@58.842,64.607 R330.2@58.842,65.602 58.885,65.644 v1(58.885,66.269) ; v1(59.108,61.025) R115.2@59.86,61.025 ; v1(59.167,63.47) C48.2@59.86,63.47 61.539,63.47 61.539,63.395 U6.8@61.526,63.382 ; v1(83,60.55) 83,58.48 83.93,57.55 J19.3@84.13,57.55 ; J19.1@84.13,54.55 85.35,54.55 85.7,54.9 v1(85.7,60.6) ; J19.5@84.13,60.55 v1(85,60.55) ; J19.7@84.13,63.55 84.18,63.5 v1(85,63.5) ; v1(85.7,71.5) J17.1@85.7,72.422
  L6 BOT w0.3: v1(30.797,35.414) C31.2@31.457,35.414 ; v1(30.86,46.064) C30.2@31.472,46.064 ; v1(30.86,48.122) 30.879,48.103 31.433,48.103 C29.2@31.472,48.064 ; v1(34.31,53.095) 34.316,53.09 34.316,52.37 C37.2@34.322,52.364 ; v1(34.5,24.2) 34.5,25.452 34.878,25.829 34.878,25.854 C49.2@35.028,26.004 ; U8.1@34.803,27.606 34.803,26.229 C49.2@35.028,26.004 ; R122.2@34.881,32.844 35.031,32.994 35.031,33.231 v1(35.3,33.5) ; C49.2@35.053,26.004 C49.2@35.028,26.004 ; v1(36.822,29.68) C32.2@36.822,30.264 ; v1(38.775,53.128) 38.775,53.101 38.822,53.054 C36.2@38.822,52.364 ; v1(42.5,36.962) 42.519,36.942 43.062,36.942 R327.2@43.1,36.905 ; v1(42.5,40.156) C166.1@43.1,40.156 44,40.156 44.175,39.98 44.175,39.934 44.305,39.805 U28.8@44.756,39.805 ; v1(44.357,43.605) 44.363,43.612 44.363,44.358 C56.2@44.369,44.364 44.48,44.475 45.565,44.475 U14.5@45.59,44.5 ; v1(44.357,48.1) 44.363,48.094 44.363,47.421 C57.2@44.369,47.414 C57.2@44.394,47.439 ; C57.2@44.369,47.389 44.519,47.239 44.544,47.239 45.468,46.315 45.725,46.315 45.75,46.29 U14.8@45.75,46.16 ; v1(44.394,42.8) 44.407,42.787 44.407,42.077 R146.1@44.419,42.064 ; R149.1@45.419,47.464 v1(45.419,48.094) ; R145.1@47.519,42.064 47.53,42.075 47.53,42.777 v1(47.54,42.787) ; R148.1@49.619,42.064 49.62,42.063 49.62,41.301 v1(49.621,41.3) ; R147.1@49.619,47.464 v1(49.619,48.225) ; R328.2@50.688,34.2 v1(51.472,34.2) ; C33.2@51.322,30.264 v1(51.9,30.264) ; C34.2@53.672,35.914 53.751,35.994 54.622,35.994 v1(54.641,36.013) ; C35.2@53.672,44.064 54.259,44.064 54.448,43.875 v1(54.475,43.875) ; v1(69.9,59.7) C46.2@70.643,59.7 R117.2@70.643,61.042 ; v1(69.9,62.511) 69.927,62.511 69.977,62.461 70.567,62.461 R119.2@70.643,62.384 R120.2@70.643,63.727 ; v1(69.9,67.601) R282.1@70.643,67.601 ; v1(69.912,68.868) R281.1@70.643,68.868 ; C46.2@70.731,59.762 71.33,60.361 72.658,60.361 73.15,60.853 U7.2@73.994,60.853 ; v1(74.223,65.048) 74.216,65.055 74.216,66.339 C136.1@74.208,66.347 74.208,68.598 74.232,68.622 U29.1@74.233,68.622 ; U29.8@78.333,68.622 78.635,68.622 78.658,68.598 C137.2@78.658,66.817 v1(78.658,65.055) ; R121.1@78.658,60.053 79.255,60.053 v1(79.501,59.808) ; R118.2@78.658,63.303 v1(78.658,64.129) ; v1(81.218,64.6) 81.218,64.627 81.529,64.938 81.529,65.482 R284.1@81.543,65.497 ; R283.1@81.543,66.817 v1(82.388,66.817)
  L6 BOT w0.35: v1(54.85,81.29) 54.85,80.55 55.375,80.025 R132.1@55.4,80.025 R131.1@55.4,78.75 ; v1(58.1,81.184) 58.1,81.17 58.395,80.875 U10.8@58.395,79.725 ; v1(59.095,81.184) 59.109,81.184 59.134,81.159 59.85,81.159 C51.2@59.938,81.071 ; J5.3@59.9,82.85 59.9,82.55 59.938,82.513 C51.2@59.938,81.071 ; C51.2@59.975,81.034 C51.2@59.938,81.071 ; U10.1@62.495,79.725 64.425,79.725 65.015,80.315 65.015,81.011 v1(65.025,81.02)
  L6 BOT w0.4: v1(8.5,81.6) 8.505,81.605 R23.2@10.433,81.605 10.433,82.703 10.274,82.861 10.274,83.66 J1.1@10.124,83.81 ; R24.2@13.71,81.605 14.485,81.605 v1(14.5,81.62) ; C27.1@53.34,30.564 53.57,30.334 v1(54.38,30.334) ; J15.1@85.7,76.172 85.8,76.272 v1(85.8,76.897)
  other v1: 48.41,20.79 49.416,20.79 50.422,20.79 51.428,20.79 52.434,20.79 53.44,20.79 52.3,84.05
3.3V_MOTOR: C82.2 C83.2 C120.2 C121.2 D14.2 R50.2 R51.2 R52.2 R53.2 R62.2 R63.2 R65.2 R67.2 R180.2 U20.6 VR3.2 VR3.4 | length 53.4
  L1 TOP w0.3: D14.2@36.489,5.425 36.539,5.425 38.114,3.85 40.94,3.85 46.65,9.56 51.56,9.56 56.279,14.279 56.279,19.701 56.729,20.15 62.13,20.15
  L1 TOP w0.4: R180.2@70.851,41.4 70.876,41.425 v1(70.876,42.241) ; v1(73.894,40.725) C82.2@73.894,41.5 75.023,41.5 ; U20.6@74.776,37.3 74.776,41.253 75.023,41.5 ; v1(76.151,40.725) C83.2@76.151,41.5 75.023,41.5 ; v1(79.9,26.3) 80.382,26.3 81.084,25.598 R62.2@81.109,25.598 ; v1(79.9,27) R63.2@81.109,27 ; R65.2@81.109,31.5 v1(81.109,32.194) ; R67.2@81.109,33 v1(81.109,33.7)
  L6 BOT w0.4: v1(79.9,26.3) 80.382,26.3 81.084,25.598 R53.2@81.109,25.598 ; v1(79.9,27) R52.2@81.109,27 ; R51.2@81.109,31.5 v1(81.109,32.194) ; R50.2@81.109,33 v1(81.109,33.7)
  other v1: 66.08,20.2 67.02,20.2 67.96,20.2 68.9,20.2
5V_EXP: C113.1 C116.1 C124.2 C125.2 C164.2 D11.2 JP10.1 R1.1 R237.2 R238.2 R253.2 R259.1 R260.2 R267.1 U26.5 U32.8 VR1.3 VR2.3 | length 42.3
  L1 TOP w0.3: v1(13.663,63.915) 13.682,63.934 13.682,64.494 R237.2@13.805,64.617 ; v1(13.682,68.4) 13.702,68.419 13.702,68.966 R238.2@13.805,69.069 ; R267.1@13.805,20.272 13.805,21.363 14.317,21.875 15.097,21.875 v1(15.116,21.894) ; R259.1@13.805,29.051 13.805,29.785 14.52,30.5 v1(17.1,30.5) ; v1(32.51,4.01) 32.515,4.015 32.515,5.42 D11.2@32.52,5.425
  L1 TOP w0.4: v1(13.17,25.952) R260.2@13.805,25.951 R260.2@13.805,25.951 ; R1.1@13.805,11.273 13.805,12.295 v1(13.84,12.33) ; U32.8@52.123,64.132 52.598,64.132 52.834,63.895 C164.2@52.834,62.793 52.847,62.78 v1(53.515,62.78)
  L3 SIGNAL w0.3: v1(13.84,12.33) 14.6,13.09 23.29,13.09 v1(23.916,12.464) ; v1(32.51,4.01) 32.82,3.7 36.91,3.7 37.46,4.25 37.46,9.491 v1(39.256,11.287)
  L4 PWR w0.3: v1(15.116,21.894) 17.494,21.894 18.35,22.75
  L6 BOT w0.3: 16.986,29.747 17.089,29.85 17.089,30.489 v1(17.1,30.5)
  other v1: 51.03,11.287 39.256,11.899 51.03,11.899 39.256,12.51 51.03,12.51 17.89,28.82 17.888,29.657 20.863,30.029 21.706,30.029 19.982,30.071 19.982,30.691 20.842,30.691 21.685,30.691
5V_MOTOR: C21.2 C22.2 C119.1 J16.1 J16.5 J20.1 J20.5 JP5.3 L3.2 R279.2 VR3.3 | length 3
  L6 BOT w0.5: J16.5@84.13,28.5 85.552,28.5 v1(85.6,28.548) ; J16.1@84.13,34.5 85.552,34.5 v1(85.6,34.548)
5V_SLN_HD: C52.2 C53.2 C58.2 C59.2 C61.2 C62.2 C63.2 C64.2 C65.2 C168.2 C406.2 C407.2 C408.2 C409.2 D15.2 R84.1 R134.1 R138.1 R139.1 R153.1 R155.1 R159.1 R160.1 R254.2 U11.16 U12.8 U15.2 U15.28 U16.8 U17.9 U17.12 U17.13 U17.16 U17.25 U17.28 U17.29 U17.32 U35.9 U35.12 U35.13 U35.16 U35.25 U35.28 U35.29 U35.32 | length 69.5
  L1 TOP w0.2: U17.13@60.97,70.6 60.943,70.627 60.457,70.627 60.278,70.806 60.278,70.842 v1(60.24,70.88) 60.24,70.934 60.379,71.073 60.943,71.073 U17.12@60.97,71.1 ; U17.28@65.771,70.6 66.394,70.6 66.604,70.81 v1(66.604,70.85) 66.381,71.073 66.031,71.073 U17.29@66.004,71.1 ; U17.32@65.771,72.6 66.394,72.6 66.537,72.458 v1(66.604,72.525) ; v1(66.211,67.64) 66.535,67.64 66.829,67.346 66.829,66.359 66.304,65.834 C65.2@66.304,65.809 ; U35.12@75.143,73.916 75.17,73.889 75.17,73.408 v1@75.4,73.178 ; U35.29@75.143,78.717 75.143,79.495 75.4,79.752 v1(75.4,79.803) 75.643,79.559 U35.28@75.643,78.717 ; v1(75.4,73.124) v1@75.4,73.178 ; U35.13@75.643,73.916 75.616,73.889 75.616,73.395 v1@75.4,73.178
  L1 TOP w0.25: R134.1@41.235,61.66 41.235,63.541 41.599,63.905 v1(42.863,63.905) ; R155.1@47.963,61.66 47.963,62.318 48.746,63.1 v1(50.5,63.1) ; R153.1@52.09,61.66 C59.2@53.209,61.66 ; v1(60.24,72.6) U17.9@60.97,72.6 ; U17.25@65.771,69.1 65.848,69.1 65.85,69.098 v1(65.85,68.625) ; v1(73.2,78.95) 73.641,78.95 73.643,78.948 U35.32@73.643,78.717 ; U35.16@77.143,73.916 77.143,73.702 77.145,73.7 v1(77.6,73.7)
  L1 TOP w0.3: v1(30.48,3.96) 30.48,5.369 D15.2@30.536,5.425 ; R139.1@45.046,76.9 R138.1@46.164,76.9 ; C168.2@47.133,77.725 47.283,77.875 C168.2@47.283,77.9 ; R160.1@49.52,76.9 R159.1@50.638,76.9 50.638,76.875 51.807,75.706 52.037,75.706 v1(52.057,75.687) ; U16.8@51.026,79.55 51.036,79.54 51.036,78.964 51.642,78.359 51.642,78.015 C61.2@51.757,77.9 v1(52.4,77.9) ; v1(60.281,69.098) v1(60.281,69.098) 60.969,69.099 U17.16@60.97,69.1 ; U35.25@77.143,78.717 77.143,79.143 v1(77.9,79.9) ; v1(78.55,79.9) 79.759,79.9 80.41,79.25 C409.2@80.435,79.25
  L1 TOP w0.4: U11.16@43.1,65.2 43.1,64.902 43.675,64.327 C52.2@43.675,63 C53.2@43.675,61.66 ; U12.8@45.705,79.55 46.35,79.55 47.283,78.617 ; C168.2@47.283,77.9 47.283,78.617 ; v1(47.65,79.052) 47.283,78.686 47.283,78.617 ; U15.2@50.72,60.1 50.93,60.31 51.86,60.31 C59.2@53.209,61.66 ; U15.28@53.26,75.34 53.26,75.061 54.2,74.121 C58.2@54.2,73 ; v1(72.993,73.916) U35.9@73.593,73.916
  L3 SIGNAL w0.3: v1(27.63,18.75) 30.48,15.9 v1(30.48,3.96)
  L6 BOT w0.4: C63.2@59.385,69.163 59.45,69.098 v1(60.281,69.098) ; C64.2@59.385,70.88 v1(60.24,70.88) ; C62.2@66.604,69.973 v1(66.604,70.85) ; v1(72.993,73.916) 73.638,73.916 C406.2@73.668,73.946 ; v1(75.4,73.124) C407.2@75.4,73.946 ; C408.2@75.4,78.6 v1(75.4,79.803)
  other v1: 22.652,23.038 22.652,23.638 22.652,24.238 45.605,76.9
5V_SLN_HD_eFuse: C122.2 C123.2 D8.1 JP10.2 R254.1 R261.2 R262.2 U26.6
  other v1: 16.719,22.48 16.719,23.013 16.719,23.547 16.719,24.08
12V/5V_MOTOR: C78.1 C79.1 C80.2 C81.2 JP5.1 U20.16 U20.21
12V_EXP: C68.1 C71.2 C73.1 C76.2 C169.2 D4.1 D6.1 D10.2 D18.1 D19.1 D20.1 D21.1 J18.1 J18.3 J18.5 J18.7 R173.1 R176.1 R252.2 U18.6 U19.6 | length 22.3
  L1 TOP w0.4: D10.2@26.567,5.433 26.603,5.397 v1(26.603,4.688)
  L6 BOT w0.4: D20.1@78.43,45.891 78.43,45.866 v1(79.396,44.9) ; D19.1@78.43,49.807 78.537,49.914 v1(79.6,49.914) ; D21.1@78.43,53.724 78.43,53.699 79.247,52.882 v1(79.8,52.882) ; D18.1@78.43,57.641 78.43,57.616 78.68,57.366 79.345,57.366 v1(79.711,57) ; v1(78.7,42.2) C169.2@78.7,42.871 ; J18.7@84.13,56.05 v1(87.78,56.05) ; J18.5@84.13,59.05 v1(87.9,59.05) ; J18.3@84.13,62.05 v1(87.9,62.05) ; J18.1@84.13,65.05 84.18,65 v1(87.9,65)
  other v1: 39.381,4.475 40.564,4.498 65.91,4.622 21.561,4.752 22.49,4.752 72.407,4.737 46.21,4.863 65.91,5.609 22.49,5.696 46.21,5.78 39.381,6.54 72.407,6.538 65.91,6.596 22.49,6.64 40.73,6.68
12V_MOTOR: C20.2 D16.2 JP5.2 R255.2 U33.7 | length 2.6
  L1 TOP w0.3: v1(27.6,7.5) 27.6,6.217 28.502,5.315 D16.2@28.552,5.315
  other v1: 80.661,10.6 81.606,10.6 82.561,10.6 22.652,14.259 22.652,14.859 22.652,15.459 77.095,24.265 78.195,24.265 79.295,24.265
12V_MOTOR_eFuse: C128.2 C129.2 D9.1 JP11.2 R255.1 R269.2 R270.2 U27.6
  other v1: 16.762,13.792 16.762,14.325 16.762,14.859 16.762,15.392
+VDDCORE: C28.1 C38.2 C39.2 C40.2 C41.2 C42.2 C43.2 C44.2 C45.2 U5.3 U5.29 U5.33 U5.50 U5.81 U5.107 U5.123 U5.139 | length 74.7
  L1 TOP w0.3: U5.33@31.972,34.064 v1(33.082,34.064) ; U5.29@31.972,36.064 32.777,36.064 v1(33.12,36.408) ; U5.3@31.972,49.064 33.077,49.064 33.143,48.998 v1(33.17,48.998) ; U5.139@36.322,51.864 36.322,50.738 v1(36.34,50.72) ; U5.50@40.322,30.764 40.322,31.908 v1(40.32,31.91) 39.6,32.63 34.542,32.63 33.397,33.775 33.371,33.775 v1(33.082,34.064) ; U5.123@44.322,51.864 44.322,50.612 v1(44.31,50.6) 44.283,50.6 43.883,50.2 36.86,50.2 v1(36.34,50.72) ; v1@44.337,50.6 50.892,50.6 v1(51.428,50.064) 51.431,50.064 v1(51.931,49.564) ; U5.81@53.172,36.564 52.203,36.564 51.997,36.77 v1(51.97,36.77) 50.91,37.83 50.91,48.57 51.904,49.564 v1(51.931,49.564) ; U5.107@53.172,49.564 v1(51.931,49.564) ; v1(33.082,34.064) 33.88,34.862 33.88,35.648 v1(33.12,36.408) ; v1(33.12,36.408) 33.77,37.058 33.77,48.464 33.18,49.055 33.18,49.082 33.394,49.296 33.394,49.316 34.249,50.17 35.79,50.17 v1(36.34,50.72)
  L6 BOT w0.3: C40.2@32.472,34.064 v1(33.082,34.064) ; C39.2@32.472,36.414 32.475,36.411 33.117,36.411 v1(33.12,36.408) ; C38.2@32.472,49.064 32.519,49.017 33.151,49.017 v1(33.17,48.998) ; C45.2@36.322,51.364 36.331,51.355 36.331,50.729 v1(36.34,50.72) ; C41.2@40.321,31.265 v1(40.32,31.91) ; v1(51.97,36.77) 51.997,36.77 52.098,36.871 52.628,36.871 C42.2@52.672,36.914
  L6 BOT w0.4: v1(44.31,50.6) 44.322,50.612 C44.2@44.322,51.364 ; v1(51.428,50.064) 51.428,51.056 C28.1@51.572,51.2 ; v1(51.931,49.564) C43.2@52.672,49.564
ADC_TEMP1: C174.2 R58.2 R347.2 | length 72.8
  L1 TOP w0.2: v1(27.125,37.705) 27.13,37.71 28.29,37.71 R58.2@28.295,37.714 ; v1(68.697,50.128) 68.697,50.154 70.018,51.476 70.668,51.476 71.449,52.256 71.449,52.302 C174.2@71.646,52.498
  L3 SIGNAL w0.2: v1(27.125,32.22) 27.803,31.542 27.803,31.399 28.443,30.759 54.8,30.759 55.549,30.011 60.411,30.011 61.195,30.795 68.445,30.795 v1(68.45,30.8)
  L6 BOT w0.2: v1(27.125,32.22) 27.087,32.258 27.087,32.4 27.058,32.428 27.058,37.584 27.125,37.651 v1(27.125,37.705) ; v1(68.45,30.8) 68.425,30.825 68.425,48.599 68.697,48.871 v1(68.697,50.128)
ADC_TEMP2: C172.2 R60.2 R344.2 | length 87.1
  L1 TOP w0.2: v1(26.6,38.7) 26.615,38.715 28.28,38.715 R60.2@28.295,38.729 ; v1(68.9,48.307) 79.011,48.307 81.51,50.806 R344.2@81.535,50.806 ; C172.2@80.535,51.801 80.537,51.801 R344.2@81.532,50.806
  L3 SIGNAL w0.2: v1(26.7,31.316) 28.216,29.8 34,29.8 34.8,29 60.9,29 61.275,28.625 v1(68.6,28.625)
  L6 BOT w0.2: v1(26.6,38.7) 26.6,31.471 26.7,31.371 v1(26.7,31.316) ; v1(68.6,28.625) 68.654,28.625 68.9,28.871 v1(68.9,48.307)
ADC_TEMP3: C177.2 R335.2 R350.2 | length 74.7
  L1 TOP w0.2: v1(25.501,44.968) 25.501,44.966 26.692,43.775 28.267,43.775 R335.2@28.295,43.803 ; v1(70.195,56.45) 70.233,56.412 72.038,56.412 72.117,56.491 80.25,56.491 81.51,57.75 R350.2@81.535,57.75 ; C177.2@80.535,58.745 80.537,58.745 R350.2@81.532,57.75
  L3 SIGNAL w0.2: v1(25.501,44.968) v1(25.501,44.968) 41.525,44.967 41.783,44.71 57.49,44.71 58.6,43.6 69.734,43.6 v1(69.767,43.633)
  L6 BOT w0.2: v1(69.767,43.633) 69.767,48.933 69.5,49.2 69.5,55.755 v1(70.195,56.45)
ADC_TEMP4: C179.2 R334.1 R353.2 | length 64.2
  L1 TOP w0.2: v1(27.55,39.75) 27.553,39.747 28.292,39.747 R334.1@28.295,39.744 ; v1(68.675,51.527) 69.5,52.352 69.5,56.741 70.093,57.335 70.093,57.845 70.418,58.17 70.418,58.193 70.646,58.42 70.668,58.42 71.449,59.201 71.449,59.249 C179.2@71.643,59.443
  L3 SIGNAL w0.2: v1(27.116,51.8) 47.98,51.8 48.305,51.475 59.676,51.475 59.728,51.527 v1(68.675,51.527)
  L6 BOT w0.2: v1(27.116,51.8) 27.116,50.919 26.637,50.44 26.637,40.681 27.55,39.767 v1(27.55,39.75)
BUS_5V: C9.2 C10.2 H2.25 H2.26 JP2.1 R10.2 U2.5 | length 3.4
  L1 TOP w0.25: R10.2@13.805,36.317 13.83,36.317 14.413,36.9 17,36.9
  other v1: 18.024,37.226 18.024,38.024 17.016,38.701 18.024,38.701 19.032,38.701 17.016,39.63 18.024,39.63 19.032,39.63
CAN_H: H1.03 R17.2 U3.7 | length 34.9
  L3 SIGNAL w0.2: H1.03@11.19,16.42 12.36,15.25 12.89,15.25 13.88,16.24 13.88,43.006 14.679,43.804 15.164,43.804 v1(15.179,43.819)
  L6 BOT w0.2: R17.2@14.702,43.909 14.754,43.857 15.141,43.857 v1(15.179,43.819) 15.233,43.819 15.386,43.973 17.257,43.973 U3.7@17.452,44.168
CAN_L: H1.01 R19.1 U3.6 | length 35
  L3 SIGNAL w0.2: H1.01@11.19,13.88 12.235,14.925 13.025,14.925 14.205,16.105 14.205,42.871 14.586,43.252 15.062,43.252 v1(15.086,43.276)
  L6 BOT w0.2: R19.1@14.533,42.883 14.585,42.883 14.941,43.238 15.048,43.238 v1(15.086,43.276) 15.14,43.276 15.324,43.093 17.257,43.093 U3.6@17.452,42.898
CAN_REF: C15.1 R17.1 R18.1 R19.2 | length 3.4
  L6 BOT w0.3: C15.1@13.483,40.633 13.508,40.658 13.508,43.983 R17.1@13.533,44.008
CANRX1: R93.2 U3.4 | length 6.3
  L1 TOP w0.2: v1(23.7,41) 24.029,40.671 R93.2@28.269,40.671
  L6 BOT w0.2: U3.4@22.402,41.628 23.092,41.628 23.7,41.019 v1(23.7,41)
CANTX1: R98.2 U3.1 | length 39.7
  L1 TOP w0.2: R98.2@58.808,46.086 58.809,46.087 59.433,46.087 59.771,46.425 v1(59.8,46.425)
  L3 SIGNAL w0.2: v1(25,45.4) 26.864,47.264 58.99,47.264 59.8,46.454 v1(59.8,46.425)
  L6 BOT w0.2: U3.1@22.402,45.438 22.42,45.419 24.981,45.419 v1(25,45.4)
efuse_BUS_5V: C7.2 C8.2 D2.1 JP2.2 R11.2 R12.2 R253.1 U2.6
  other v1: 16.315,31.175 16.986,31.175 16.315,31.708 16.986,31.708 16.315,32.241 16.986,32.241 16.986,32.775
eFUSE_ILIM_5V_MOTOR: R274.2 U27.9 | length 2.3
  L1 TOP w0.2: U27.9@18.412,18.392 19.538,18.392 20.318,19.172 R274.2@20.343,19.172
eFUSE_ILIM_5V_SLN_HD: R266.2 U26.9 | length 2.3
  L1 TOP w0.2: U26.9@18.412,27.17 19.538,27.17 20.318,27.951 R266.2@20.343,27.951
eFUSE_ILIM_STX_12V: R8.2 U1.9 | length 2.2
  L1 TOP w0.2: U1.9@18.412,9.616 19.666,9.616 20.318,10.268 R8.2@20.343,10.268
eFUSE_ILIM_VBUS_5V: R16.2 U2.9 | length 2.3
  L1 TOP w0.25: U2.9@18.412,35.368 19.369,35.368 20.318,36.317 R16.2@20.343,36.317
efuse_STX_12V: C1.2 C2.2 D1.1 JP1.2 R3.2 R4.2 R252.1 U1.6
  other v1: 16.719,4.891 16.719,5.424 16.719,5.958 16.719,6.491